# EAGLE board homecontroller_main (EAGLE 6.5.0)
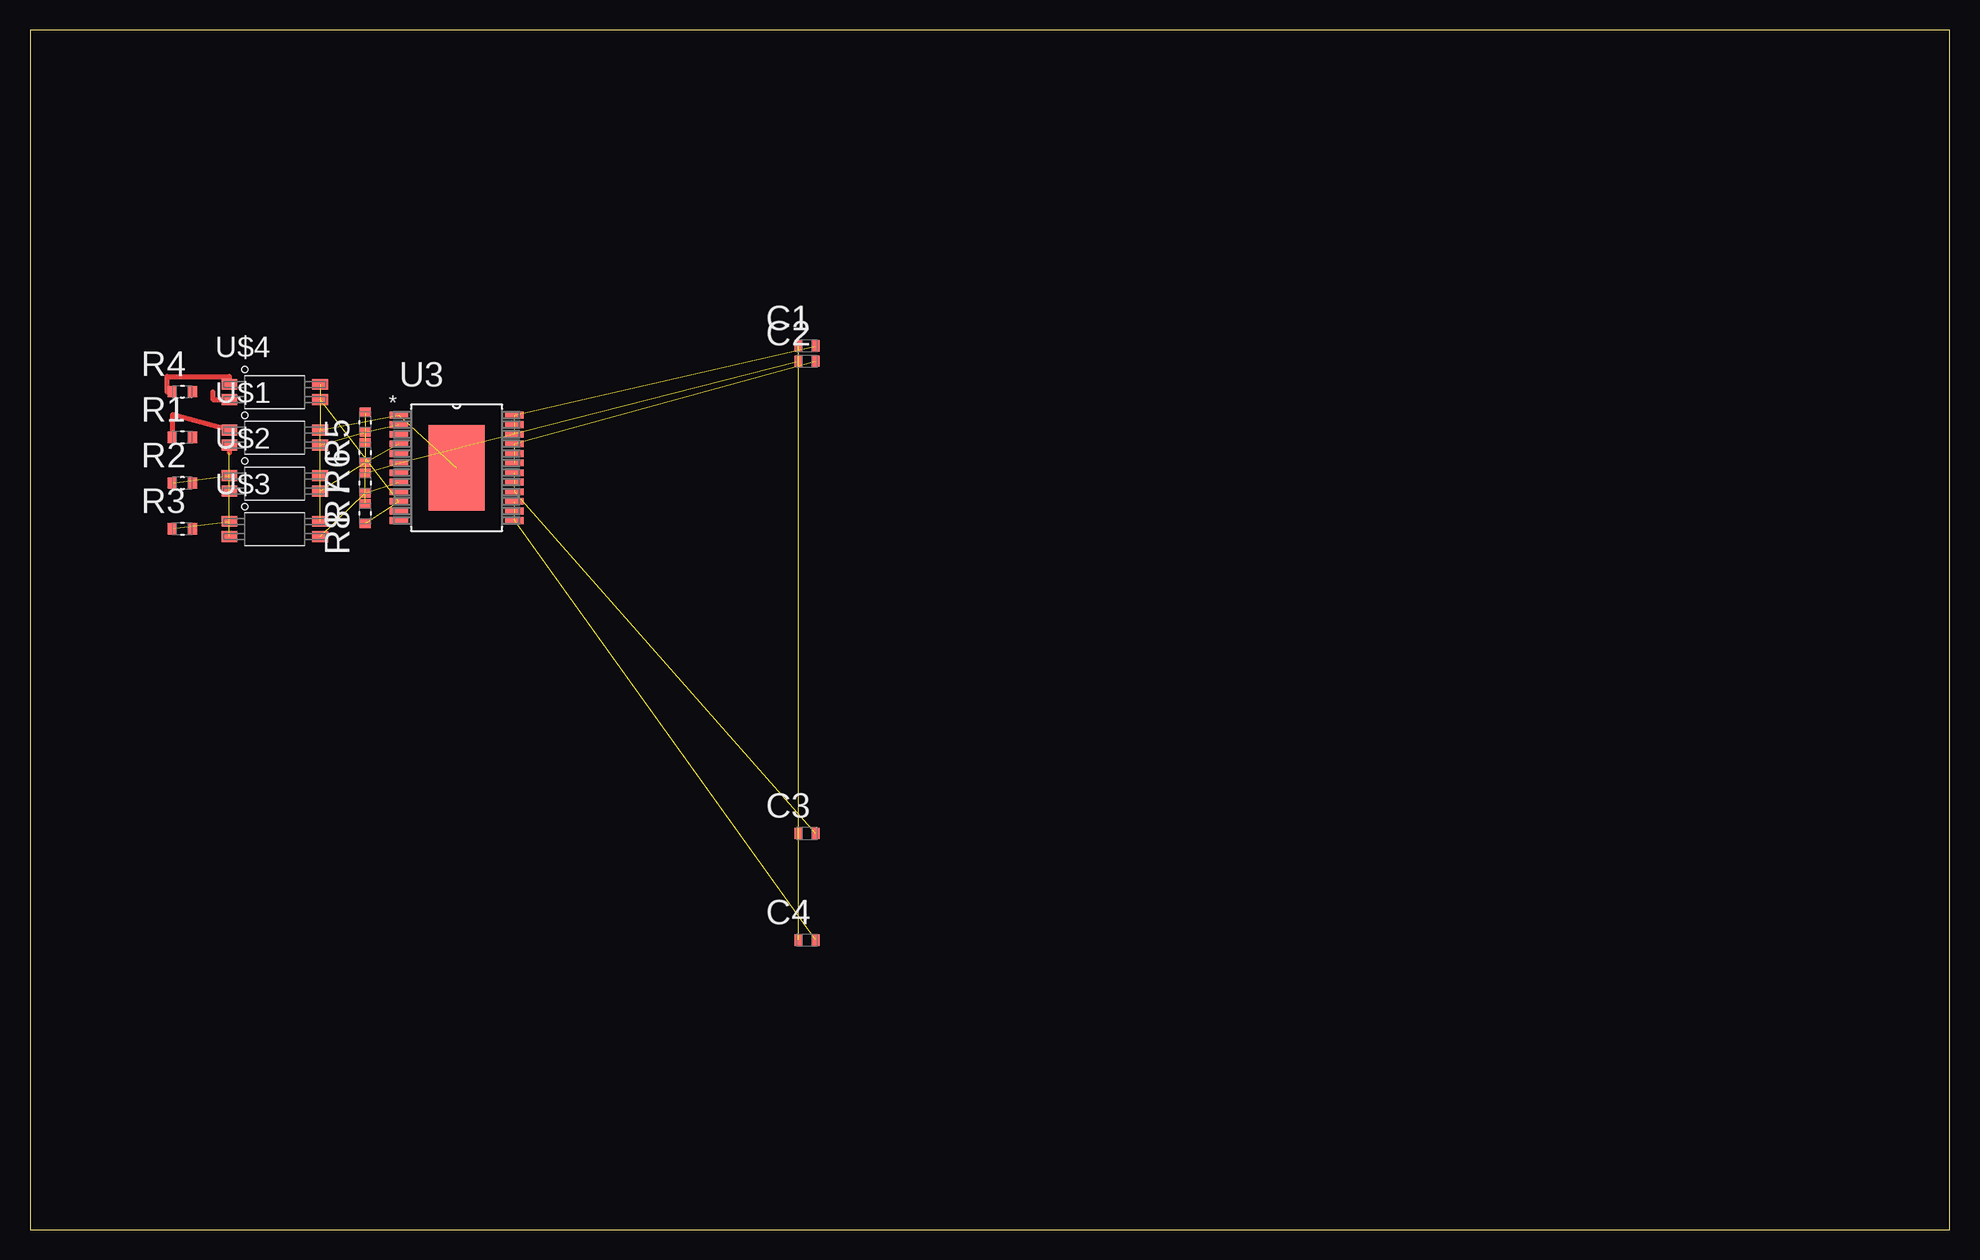
[diagram p0: board, top side]

Size 160 x 100 mm. Coordinates in mm from the lower left corner, seen from the top.
Outline: 0,0 160,0 160,100 0,100 0,0
Copper layers (1*16): Top 0.035mm / dielectric 1.5mm / Bottom 0.035mm
Design rules "default": minimum track width 10mil, minimum drill 24mil, track to track 8mil, track to pad 8mil, pad to pad 8mil, via to via 8mil, smd to smd 8mil, copper to edge 40mil, drill to drill 8mil, minimum pad ring 10mil, minimum via ring 8mil, stop-mask expansion 4mil, vias tented up to drill 0mil, thermal gap 10mil

## Footprints (pad centres in the part's own frame; a part is rotated, then mirrored left to right if it is on the bottom)
CAPC1608X85N = smd 0.66 x 0.94: 1 -0.711,0; 2 0.711,0
RESC1608X60N = smd 0.762 x 0.94: 1 -0.838,0; 2 0.838,0
SOP80P1030X247-25N = smd 1.549 x 0.559: 1 -4.826,4.394; 2 -4.826,3.607; 3 -4.826,2.794; 4 -4.826,2.007; 5 -4.826,1.194; 6 -4.826,0.406; 7 -4.826,-0.406; 8 -4.826,-1.194; 9 -4.826,-2.007; 10 -4.826,-2.794; 11 -4.826,-3.607; 12 -4.826,-4.394; 13 4.826,-4.394; 14 4.826,-3.607; 15 4.826,-2.794; 16 4.826,-2.007; 17 4.826,-1.194; 18 4.826,-0.406; 19 4.826,0.406; 20 4.826,1.194; 21 4.826,2.007; 22 4.826,2.794; 23 4.826,3.607; 24 4.826,4.394 | smd 4.699 x 7.112: 25 0,0
SOP-4 = smd 1.3 x 0.9: 1 -3.701,0.613; 2 -3.701,-0.657; 3 3.869,-0.657; 4 3.869,0.613

## Placement (x,y rotation side)
C1  10nF 50V  [CAPC1608X85N]  64.77,73.66 0 top
C2  10nF 50V  [CAPC1608X85N]  64.77,72.39 0 top
C3  10nF 50V  [CAPC1608X85N]  64.77,33.02 0 top
C4  10nF 50V  [CAPC1608X85N]  64.77,24.13 0 top
R1  1K Ohms  [RESC1608X60N]  12.7,66.04 0 top
R2  1K Ohms  [RESC1608X60N]  12.7,62.23 0 top
R3  1K Ohms  [RESC1608X60N]  12.7,58.42 0 top
R4  1K Ohms  [RESC1608X60N]  12.7,69.85 0 top
R5  47K Ohms  [RESC1608X60N]  27.94,67.31 90 top
R6  47K Ohms  [RESC1608X60N]  27.94,64.77 90 top
R7  47K Ohms  [RESC1608X60N]  27.94,62.23 90 top
R8  47K Ohms  [RESC1608X60N]  27.94,59.69 90 top
U3  VNI4140K  [SOP80P1030X247-25N]  35.56,63.5 0 top
U$1  TCMT1106  [SOP-4]  20.32,66.04 0 top
U$2  TCMT1106  [SOP-4]  20.32,62.23 0 top
U$3  TCMT1106  [SOP-4]  20.32,58.42 0 top
U$4  TCMT1106  [SOP-4]  20.32,69.85 0 top

## Library data of the parts
C1-C4 = Kemet_By_element14_Batch_1; MPN: C0603C103K5RACTU; OC_FARNELL: 1414609; OC_NEWARK: 30C5334; SUPPLIER: Kemet; TOLERANCE: ±10%; VOLTAGERATING: 50V
R1-R4 = Vishay_By_element14_Batch_1; MPN: CRCW06031K00FKEA; OC_FARNELL: 1469740; OC_NEWARK: 52K8015; SUPPLIER: Vishay; TOLERANCE: ± 1.0 %; WATTAGE: 0.1W
R5-R8 = Vishay_By_element14_Batch_1; MPN: CRCW060347K0FKEA; OC_FARNELL: 1469811; OC_NEWARK: 52K8548; SUPPLIER: Vishay; TOLERANCE: ± 1.0 %; WATTAGE: 0.1W
U3 = strasys_standard; MPN: VNI4140K; OC_FARNELL: 2309422; OC_NEWARK: 70W1089; PACKAGE: SO-24; SUPPLIER: STMICROELECTRONICS
U$1-U$4 = strasys_standard; MANUFACTURER: Vishay; MPN: TCMT1106; OC_FARNELL: 2251262; PACKAGE: SOP-4

## Nets
0V: C1.1 C2.1 C3.1 C4.1 R5.2 R6.2 R7.2 R8.2 U3.6
+24V: U3.1 U3.25 U$1.4 U$2.4 U$3.4 U$4.4
DGND: U$1.2 U$2.2 U$3.2
N$1: R1.1 U$1.1
N$2: R2.1 U$2.1
N$3: R3.1 U$3.1
N$4: R4.1 U$4.1
N$5: R5.1 U3.2 U$1.3
N$6: R6.1 U3.4 U$2.3
N$7: R7.1 U3.8 U$3.3
N$8: R8.1 U3.10 U$4.3
N$9: C1.2 U3.22 U3.23 U3.24
OUT_2: C2.2 U3.19 U3.20 U3.21
OUT_3: C3.2 U3.16 U3.17 U3.18
OUT_4: C4.2 U3.13 U3.14 U3.15
S$1: U$4.2

## Tracks (layer width: path | path; a pad name or v marks a point on that pad's centre or on a via)
0V  (8 unrouted)
+24V  (5 unrouted)
DGND  (2 unrouted)
  Top 0.406: U$1.2 16.62,64.77
N$1
  Top 0.406: U$1.1 11.86,67.92 R1.1
N$2  (1 unrouted)
N$3  (1 unrouted)
N$4
  Top 0.406: R4.1 11.43,69.85 11.43,71.12 16.62,71.12 U$4.1
N$5  (2 unrouted)
N$6  (2 unrouted)
N$7  (2 unrouted)
N$8  (2 unrouted)
N$9  (3 unrouted)
OUT_2  (3 unrouted)
OUT_3  (3 unrouted)
OUT_4  (3 unrouted)
S$1
  Top 0.406: 15.24,69.85 15.24,69.19 U$4.2